# EAGLE board Module Current Probe (EAGLE 7.2.0)
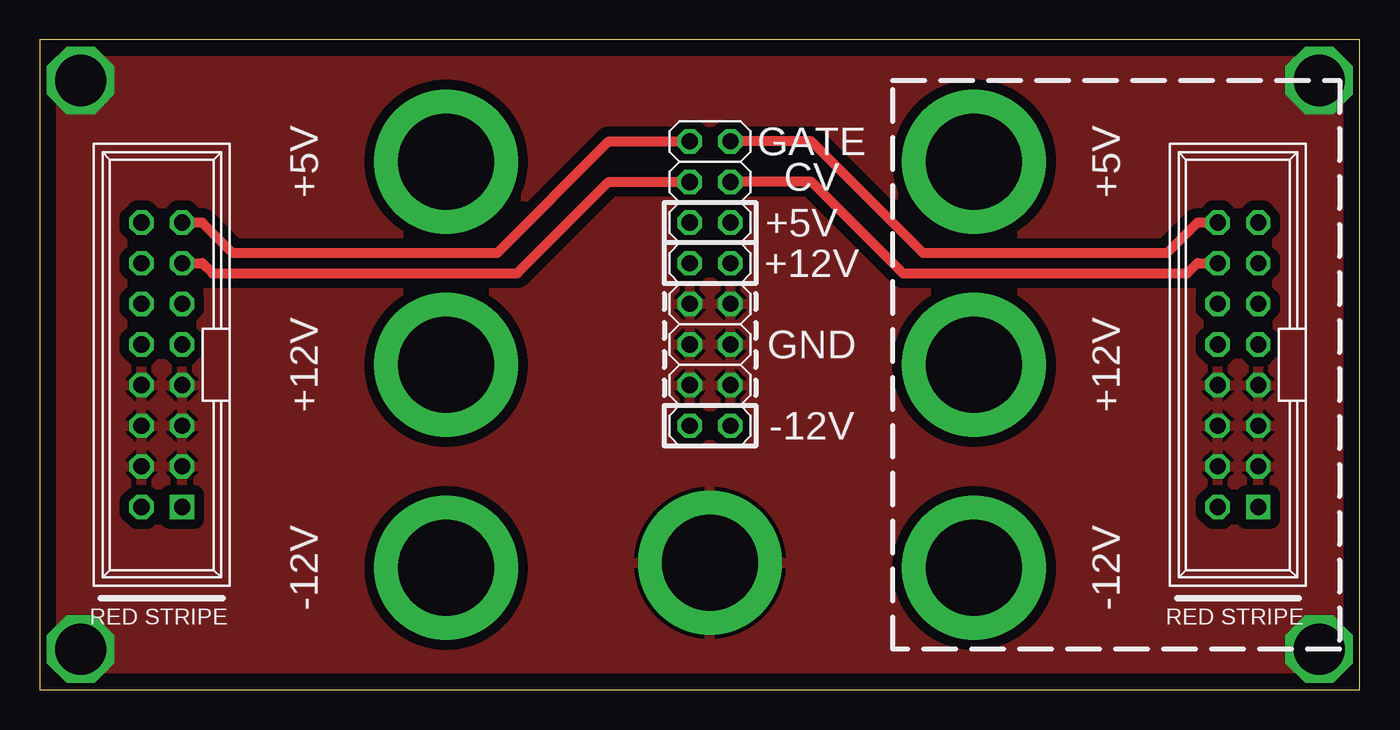
[diagram p0: board, top side]
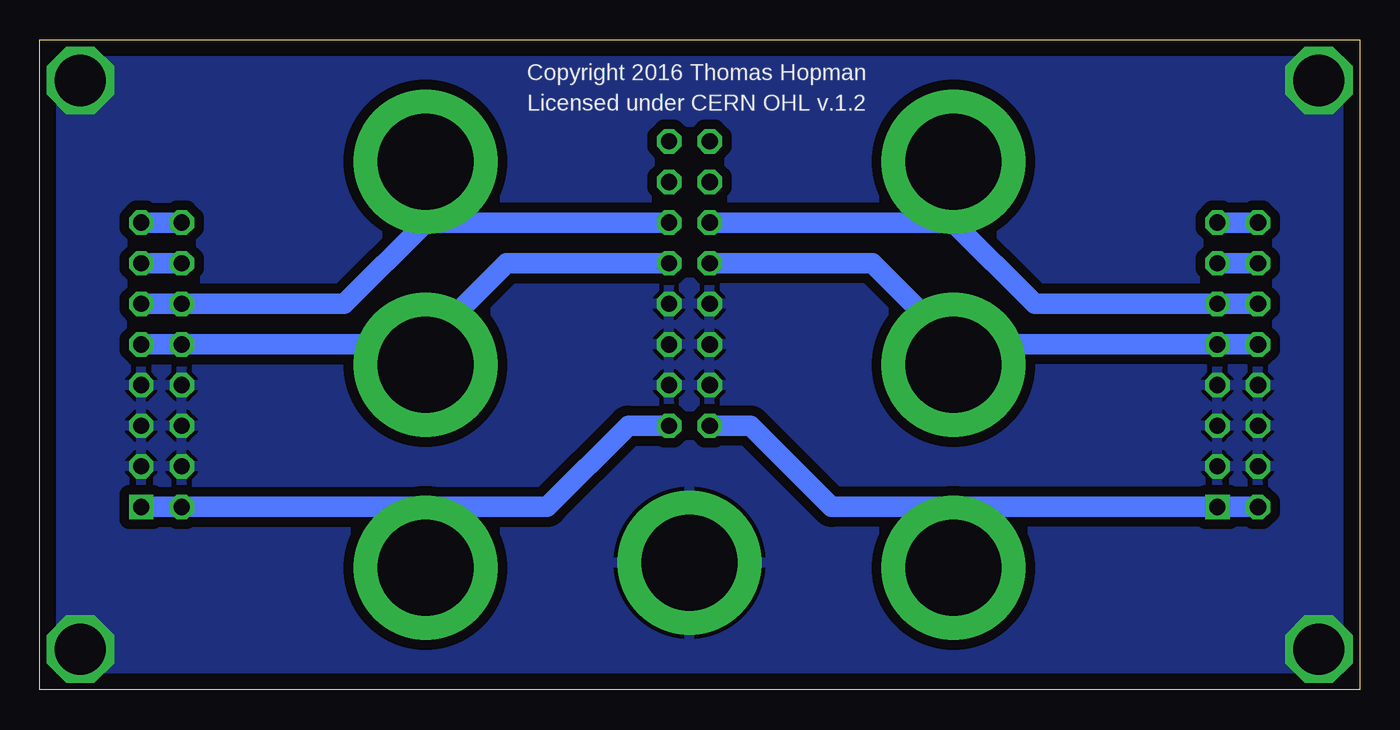
[diagram p1: board, bottom side, seen from below]

Size 82.53 x 40.63 mm. Coordinates in mm from the lower left corner, seen from the top.
Outline: 0,0 82.53,0 82.53,40.63 0,40.63 0,0
Copper layers (1*16): Top 0.035mm / dielectric 1.5mm / Bottom 0.035mm
Design rules "default": minimum track width 10mil, minimum drill 24mil, track to track 8mil, track to pad 8mil, pad to pad 8mil, via to via 8mil, smd to smd 8mil, copper to edge 40mil, drill to drill 8mil, minimum pad ring 10mil, minimum via ring 8mil, stop-mask expansion 4mil, vias tented up to drill 0mil, thermal gap 10mil

## Footprints (pad centres in the part's own frame; a part is rotated, then mirrored left to right if it is on the bottom)
PINSHRD_PTH_2X08 = drill 1.016 square: 1 -8.89,-1.27 | drill 1.016 octagon: 2 -8.89,1.27; 3 -6.35,-1.27; 4 -6.35,1.27; 5 -3.81,-1.27; 6 -3.81,1.27; 7 -1.27,-1.27; 8 -1.27,1.27; 9 1.27,-1.27; 10 1.27,1.27; 11 3.81,-1.27; 12 3.81,1.27; 13 6.35,-1.27; 14 6.35,1.27; 15 8.89,-1.27; 16 8.89,1.27
BANANA-PRINT = drill 6 pad 9: P$1 0,0
2X08 = drill 1.016 octagon: 1 -8.89,-1.27; 2 -8.89,1.27; 3 -6.35,-1.27; 4 -6.35,1.27; 5 -3.81,-1.27; 6 -3.81,1.27; 7 -1.27,-1.27; 8 -1.27,1.27; 9 1.27,-1.27; 10 1.27,1.27; 11 3.81,-1.27; 12 3.81,1.27; 13 6.35,-1.27; 14 6.35,1.27; 15 8.89,-1.27; 16 8.89,1.27

## Placement (x,y rotation side)
J1  CON_HEADER_2X08-PTH-SHROUDED  [PINSHRD_PTH_2X08]  7.62,20.32 90 top
J2  CON_HEADER_2X08-PTH-SHROUDED  [PINSHRD_PTH_2X08]  74.93,20.32 90 top
J3  BANANA-JACK  [BANANA-PRINT]  25.4,7.62 0 top
J4  BANANA-JACK  [BANANA-PRINT]  25.4,20.32 0 top
J5  BANANA-JACK  [BANANA-PRINT]  25.4,33.02 0 top
J6  BANANA-JACK  [BANANA-PRINT]  58.42,7.62 0 top
J7  BANANA-JACK  [BANANA-PRINT]  58.42,20.32 0 top
J8  BANANA-JACK  [BANANA-PRINT]  58.42,33.02 0 top
J9  BANANA-JACK  [BANANA-PRINT]  41.91,7.94 0 top
JP1  [2X08]  41.91,25.4 90 top

## Library data of the parts
J1 J2 = tomatek
J3-J9 = con-banana
JP1 = pinhead

## Nets
+5V: J1.11 J1.12 J5.P$1 JP1.12
+5VOUT: J2.11 J2.12 J8.P$1 JP1.11
+12V: J1.9 J1.10 J4.P$1 JP1.10
+12VOUT: J2.9 J2.10 J7.P$1 JP1.9
-12V: J1.1 J1.2 J3.P$1 JP1.2
-12VOUT: J2.1 J2.2 J6.P$1 JP1.1
CV: J1.13 J1.14 JP1.14
CVOUT: J2.13 J2.14 JP1.13
GATE: J1.15 J1.16 JP1.16
GATEOUT: J2.15 J2.16 JP1.15
GND: J1.3 J1.4 J1.5 J1.6 J1.7 J1.8 J2.3 J2.4 J2.5 J2.6 J2.7 J2.8 J9.P$1 JP1.3 JP1.4 JP1.5 JP1.6 JP1.7 JP1.8

## Tracks (layer width: path | path; a pad name or v marks a point on that pad's centre or on a via)
+5V
  Bottom 1.27: J1.12 J1.11 20.32,24.13 25.4,29.21 | J5.P$1 25.4,29.21 | 25.4,29.21 JP1.12
+5VOUT
  Bottom 1.27: J2.11 J2.12 63.5,24.13 58.42,29.21 | J8.P$1 58.42,29.21 | JP1.11 58.42,29.21
+12V
  Bottom 1.27: J1.10 J1.9 25.4,21.59 | 25.4,21.59 J4.P$1 | 25.4,21.59 30.48,26.67 JP1.10
+12VOUT
  Bottom 1.27: 58.42,21.59 J7.P$1 | J2.9 J2.10 58.42,21.59 | 58.42,21.59 53.34,26.67 JP1.9
-12V
  Bottom 1.27: J1.2 J1.1 25.4,11.43 | 25.4,11.43 J3.P$1 | 25.4,11.43 33.02,11.43 38.1,16.51 JP1.2
-12VOUT
  Bottom 1.27: J2.1 J2.2 58.42,11.43 | 58.42,11.43 J6.P$1 | 58.42,11.43 50.8,11.43 45.72,16.51 JP1.1
CV
  Top 0.61: J1.13 10.16,26.67 10.79,26.04 29.84,26.04 35.56,31.75 JP1.14
  Bottom 1.27: J1.14 J1.13
CVOUT
  Top 0.61: J2.14 72.39,26.67 71.75,26.04 53.98,26.04 48.26,31.75 JP1.13
  Bottom 1.27: J2.13 J2.14
GATE
  Top 0.61: J1.15 10.16,29.21 12.06,27.3 28.57,27.3 35.56,34.29 JP1.16
  Bottom 1.27: J1.16 J1.15
GATEOUT
  Top 0.61: J2.16 72.39,29.21 70.48,27.3 55.24,27.3 48.26,34.29 JP1.15
  Bottom 1.27: J2.15 J2.16
GND  (via drill 3.2)
  other vias: 2.54,38.1 2.54,2.54 80.01,38.1 80.01,2.54
  pour Bottom (isolate 0.61): 0,40.64 82.55,40.64 82.55,0 0,0
  pour Top (isolate 0.61): 0,0 82.55,0 82.55,40.01 0,40.01

## Text on the board
bPlace: Copyright 2016 Thomas Hopman | Licensed under CERN OHL v.1.2
_tsilk: GATE | +5V | +5V | CV | +5V | +12V | GND | +12V | +12V | -12V | -12V | -12V